# Altium PCB ESP32DOWDQ6.PcbDoc (part 1 of 2)
Units mm, origin at the board's own origin, x right, y up, seen from the top; angles counter-clockwise.
Board outline 70 x 35 mm, 2 copper layers (Top Layer, Bottom Layer); 86 components, 85 nets, 513 pads, 4 vias.
Unrouted connection lines stored in the file: 70.
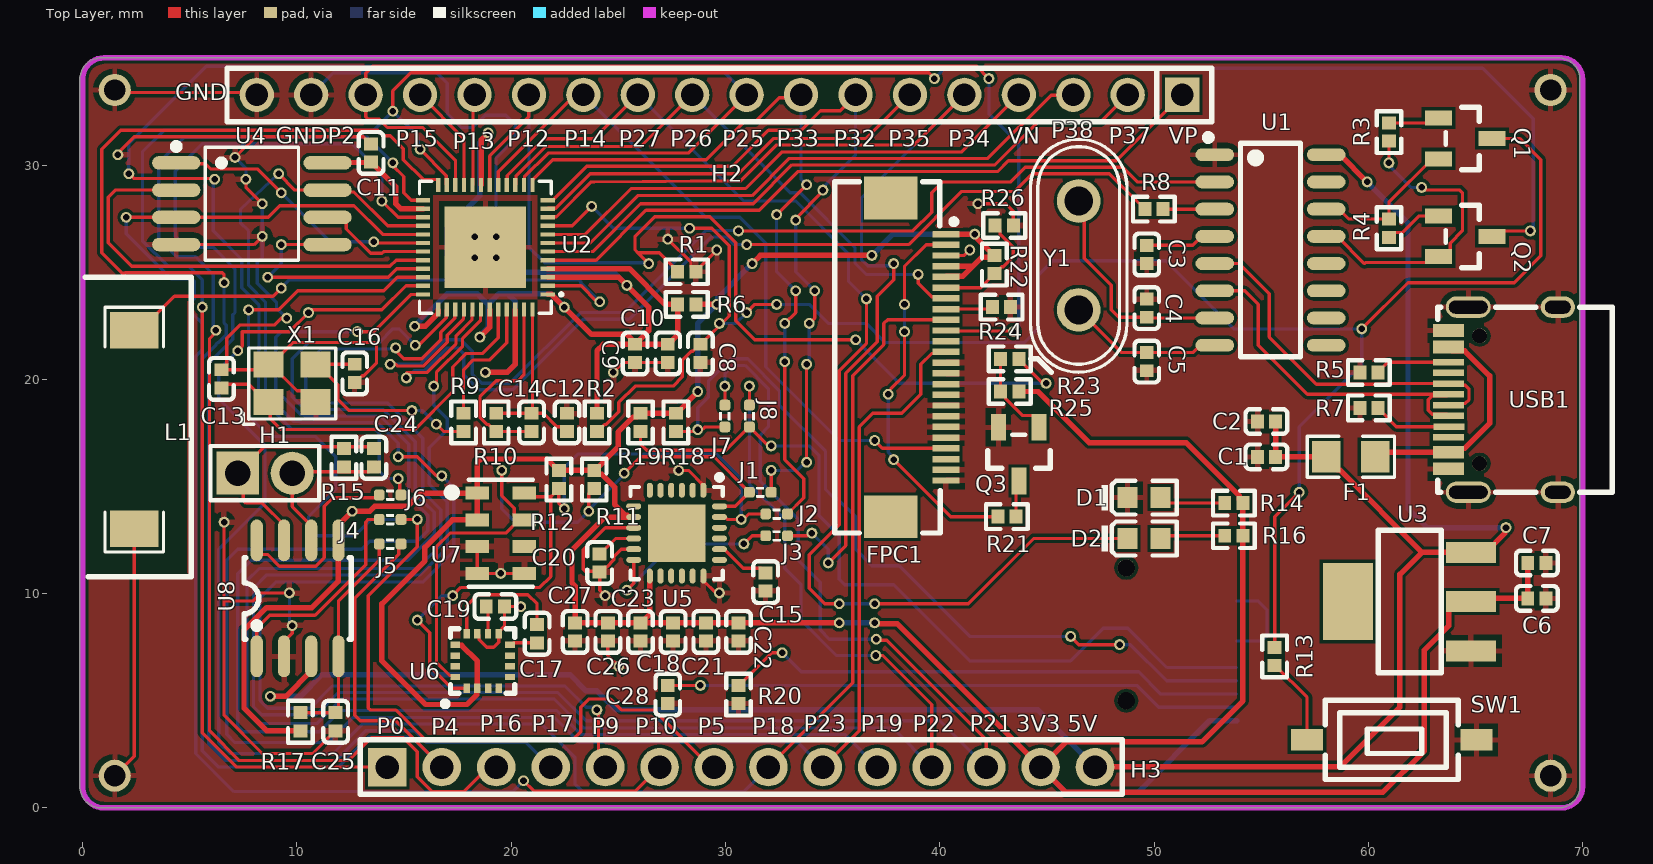
[diagram p0: Top Layer view]
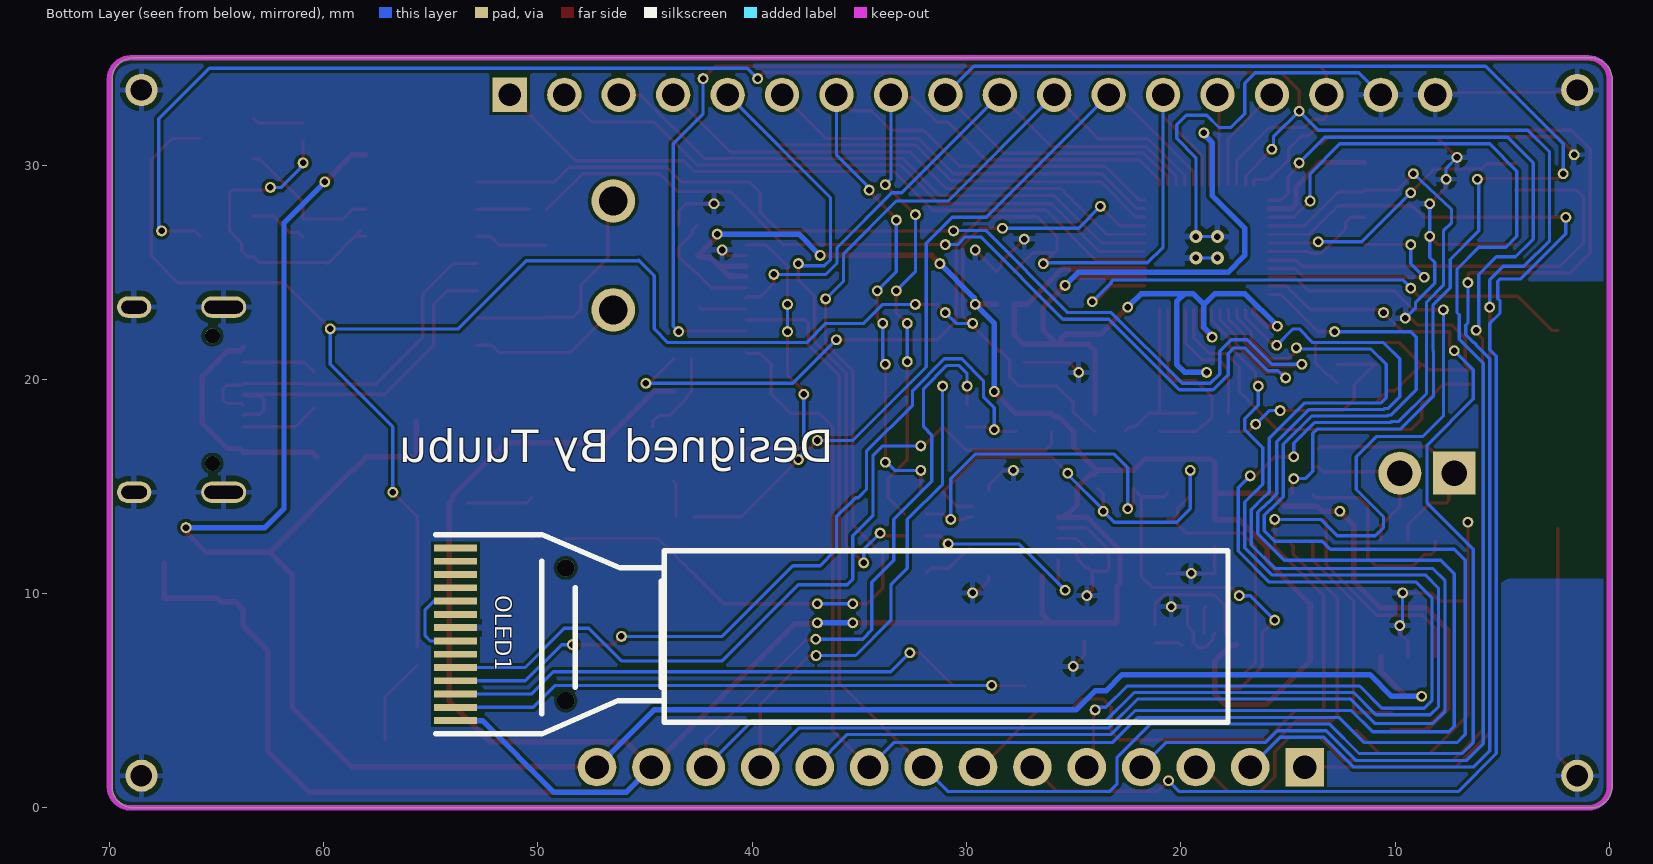
[diagram p1: Bottom Layer view, seen from below]
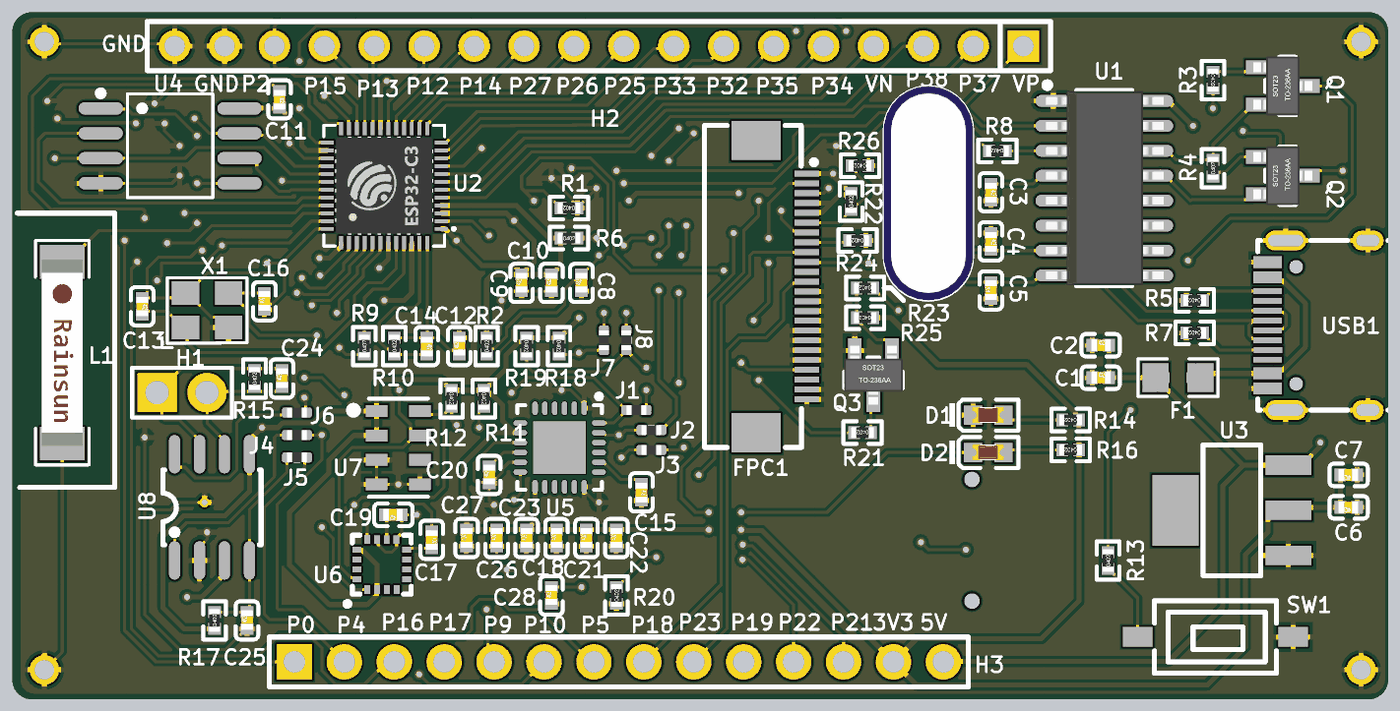
[diagram p3: 3D render of the assembled board from above, using the file's embedded part models]

## Layer stack, top to bottom
Top Solder: solder mask 0.0102, Solder Resist, Dk 3.5
Top Layer: signal copper 0.0356
Dielectric 1: dielectric 0.32, FR-4, Dk 4.8
Bottom Layer: signal copper 0.0356
Bottom Solder: solder mask 0.0102, Solder Resist, Dk 3.5

## Board outline
-0.127,1 -0.127,34 cw(c0.873,34) 0.873,35 68.873,35 cw(c68.873,34) 69.873,34 69.873,1 cw(c68.873,1) 68.873,0 0.873,0 cw(c0.873,1)

## Design rules (kind name [scope] priority, off if disabled: settings)
Clearance [All] p1: gap=0.152 ignorepadtopadclearanceinfootprint=TRUE
HoleSize [All] p1: absolutevalues=TRUE maxlimit=2.54 minlimit=0.254 maxpercent=80.000 minpercent=20.000
HoleToHoleClearance [All] p1: gap=0.102 allowstackedmicrovias=TRUE
MinimumSolderMaskSliver [All] p1: minsoldermaskwidth=0.102
PolygonConnect [All] p1: connectstyle=Relief reliefconductorwidth=0.254 reliefentries=4 polygonreliefangle="90 Angle" airgapwidth=0.254
RoutingVias [All] p1: holewidth=0.305 width=0.61 viastyle="Through Hole" minholewidth=0.305 minwidth=0.61 maxholewidth=0.305 maxwidth=0.61
SilkToSilkClearance [All] p1: silktosilkclearance=0.025
SilkToSolderMaskClearance [IsPad] p1: minsilkscreentomaskgap=0.025 clearancetoexposedcopper=TRUE
SolderMaskExpansion [All] p1: expansion=0.102 istentingtop=FALSE
Width power [InNetClass('VCC')] p1: maxlimit=0.508 minlimit=0.254 preferedwidth=0.254
Width [All] p2: maxlimit=0.152 minlimit=0.152 preferedwidth=0.152
25 further rules are at their usual default settings.

## Classes and differential pairs
net class VCC: 3V3 3V3A 5VD VBUS VDD_SDIO

## Components (designator, comment, footprint, x,y, rotation, side; value= is the part's Value field where it differs from the comment)
C1 "10uF (106) 20% 6.3V" 0402_C 55.245,16.383 r0 top
C2 "100nF (104) 10% 16V" 0402_C 55.245,18.034 r0 top
C3 "100nF (104) 10% 16V" 0402_C 49.657,25.825 r270 top
C4 "22pF (220) 5% 50V" 0402_C 49.657,23.324 r270 top
C5 "22pF (220) 5% 50V" 0402_C 49.657,20.828 r90 top
C6 "10uF (106) 20% 6.3V" 0402_C 67.862,9.779 r180 top
C7 "100nF (104) 10% 16V" 0402_C 67.862,11.43 r180 top
C8 "100nF (104) 10% 16V" 0402_C 28.829,21.209 r90 top
C9 "10uF (106) 20% 6.3V" 0402_C 25.781,21.209 r90 top
C10 "100nF (104) 10% 16V" 0402_C 27.305,21.209 r90 top
C11 "1.0uF (105) 10% 25V" 0402_C 13.462,30.563 r270 top
C12 "10nF (103) 10% 50V" 0402_C 22.606,17.99 r90 top
C13 "10pF (100) 5% 50V" 0402_C 6.477,20.022 r270 top
C14 "330pF (331) 5% 50V" 0402_C 20.955,17.99 r270 top
C15 "2.2nF (222) 10% 50V" 0402_C 31.877,10.541 r270 top
C16 "10pF (100) 5% 50V" 0402_C 12.7,20.276 r90 top
C17 "2.2nF (222) 10% 50V" 0402_C 21.209,8.128 r270 top
C18 "2.2nF (222) 10% 50V" 0402_C 27.559,8.211 r90 top
C19 "4.7uF (475) 20% 10V" 0402_C 19.26,9.398 r180 top
C20 "100nF (104) 10% 16V" 0402_C 24.13,11.43 r90 top
C21 "10nF (103) 10% 50V" 0402_C 29.083,8.211 r90 top
C22 "2.2nF (222) 10% 50V" 0402_C 30.607,8.211 r90 top
C23 "100nF (104) 10% 16V" 0402_C 26.035,8.211 r90 top
C24 "100pF (101) 5% 50V" 0402_C 13.589,16.339 r90 top
C25 "15pF (150) 5% 50V" 0402_C 11.811,4.02 r90 top
C26 "1.0uF (105) 10% 25V" 0402_C 24.511,8.211 r90 top
C27 "4.7uF (475) 20% 10V" 0402_C 22.987,8.211 r90 top
C28 "4.7uF (475) 20% 10V" 0402_C 27.305,5.29 r90 top
D1 "白灯 0603" 0603_LED_S1 49.522,14.478 r0 top
D2 "白灯 0603" 0603_LED_S1 49.522,12.573 r0 top
F1 "ASMD0805-050" F0805 59.182,16.383 r180 top
FPC1 "FPC-05F-24PH20" FPC-SMD_24P-P0.50_FPC-05F-24PH20 39.007,21.029 r270 top
H1 "X6511WV-02H-C30D60" HDR-TH_2P-P2.54-V-M 8.509,15.621 r0 top
H2 "KH-2.54PH180-1X18P-L11.5" HDR-TH_18P-P2.54-V-M 29.718,33.274 r180 top
H3 "KH-2.54PH180-1X14P-L11.5" HDR-TH_14P-P2.54-V-M 30.734,1.905 r0 top
J1 "跳线" RES_0402 31.623,14.732 r0 top
J2 "跳线" RES_0402 32.385,13.716 r0 top
J3 "跳线" RES_0402 32.385,12.7 r0 top
J4 "跳线" RES_0402 14.351,13.462 r0 top
J5 "跳线" RES_0402 14.351,12.319 r0 top
J6 "跳线" RES_0402 14.351,14.605 r0 top
J7 "跳线" RES_0402 29.972,18.288 r90 top
J8 "跳线" RES_0402 31.115,18.288 r90 top
L1 "AN9520-245" ANT-SMD_L9.5-W2.1 2.413,17.653 r270 top
OLED1 "QG-2832TLBFG02" OLED-SMD_QG-9616TSWCG02 53.848,8.102 r0 bottom
Q1 "SS8050 Y1" SOT-23(SOT-23-3) 64.516,31.242 r180 top
Q2 "SS8050 Y1" SOT-23(SOT-23-3) 64.516,26.67 r180 top
Q3 "SS8050 Y1" SOT-23(SOT-23-3) 43.688,16.51 r90 top
R1 "10KΩ (1002) ±1%" 0402_R 28.194,25.019 r180 top
R2 "10KΩ (1002) ±1%" 0402_R 24.003,17.99 r90 top
R3 "12KΩ (1202) ±1%" 0402_R 60.96,31.54 r270 top
R4 "12KΩ (1202) ±1%" 0402_R 60.96,27.051 r90 top
R5 "5.1KΩ (5101) ±1%" 0402_R 60.027,20.32 r180 top
R6 "0Ω (0R0) ±1%" 0402_R 28.194,23.495 r0 top
R7 "5.1KΩ (5101) ±1%" 0402_R 60.027,18.669 r180 top
R8 "49.9Ω (49R9) ±1%" 0402_R 49.994,27.94 r180 top
R9 "0Ω (0R0) ±1%" 0402_R 17.78,17.99 r90 top
R10 "20KΩ (2002) ±1%" 0402_R 19.304,17.99 r90 top
R11 "4.7KΩ (4701) ±1%" 0402_R 23.876,15.323 r270 top
R12 "4.7KΩ (4701) ±1%" 0402_R 22.225,15.323 r270 top
R13 "1KΩ (1001) ±1%" 0402_R 55.626,7.068 r90 top
R14 "1KΩ (1001) ±1%" 0402_R 53.721,14.224 r180 top
R15 "10Ω (10R0) ±1%" 0402_R 12.192,16.339 r90 top
R16 "1KΩ (1001) ±1%" 0402_R 53.721,12.7 r180 top
R17 "4.7KΩ (4701) ±1%" 0402_R 10.16,4.02 r90 top
R18 "4.7KΩ (4701) ±1%" 0402_R 27.686,17.99 r270 top
R19 "4.7KΩ (4701) ±1%" 0402_R 26.035,17.99 r270 top
R20 "470Ω (4700) ±1%" 0402_R 30.607,5.29 r90 top
R21 "10Ω (10R0) ±1%" 0402_R 43.136,13.589 r180 top
R22 "4.7KΩ (4701) ±1%" 0402_R 42.545,25.356 r90 top
R23 "1KΩ (1001) ±1%" 0402_R 43.263,20.955 r180 top
R24 "4.7KΩ (4701) ±1%" 0402_R 42.882,23.368 r180 top
R25 "10KΩ (1002) ±1%" 0402_R 43.263,19.431 r180 top
R26 "4.7KΩ (4701) ±1%" 0402_R 43.009,27.178 r180 top
SW1 "TS-1092S-B1D2-W" SW-SMD_L6.1-W3.6-LS7.9 61.087,3.175 r180 top
U1 "CH340G" SOIC-16_150mil 55.432,26.035 r270 top
U2 "ESP32" QFN-48-EP3.8 18.796,26.162 r90 top
U3 "AMS1117-3.3_C369933" SOT-223-3_L6.5-W3.4-P2.30-LS7.0-BR 61.927,9.628 r0 top
U4 "GD25Q32CSIG_C318845" SOIC-8_L5.3-W5.3-P1.27-LS8.0-BL 7.9,28.194 r270 top
U5 "MPU-6050" QFN-24_4x4x05P 27.718,12.823 r180 top
U6 "HWC5883L" LPCC-16_L3.0-W3.0-P0.50-BL 18.669,6.858 r0 top
U7 "MS5611" MS5611 19.515,12.817 r0 top
U8 "TJA1042T/1J" SOIC-8_L5.0-W4.0-P1.27-LS6.0-BL 10.033,9.779 r0 top
USB1 "TYPEC-304-BCP16" USB-C-SMD_TYPEC-304-BCP16 66.294,19.05 r90 top
X1 "40MHz" OSC-SMD_4P-L3.2-W2.5-BL 9.779,19.812 r0 top
Y1 "XTAL" XTAL_socket 46.482,25.781 r90 top

## Footprints (in the part's own frame and the unit in brackets; to place one, negate y for a bottom-side part, rotate by r counter-clockwise, add the part's x,y. Pads: shape width x height; smd on the part's side, far side on the other; paste and mask are expansions set on the pad)
0402_C [mm]
  rect 0.6x0.65 smd mask+0.051: 1(-0.425,0) 2(0.425,0)
  silkscreen extent -0.97,-0.58 0.97,0.58, body extent -0.48,-0.3 0.52,0.3, height 0.2
0402_R [mm]
  rect 0.6x0.65 smd mask+0.051: 1(-0.425,0) 2(0.425,0)
  silkscreen extent -0.97,-0.58 0.98,0.58, body extent -0.57,-0.27 0.58,0.28, height 0.41
0603_LED_S1 [mm]
  rect 0.93x0.98 smd: A(0.77,0) K(-0.77,0)
  silkscreen extent -1.98,-0.79 1.54,0.79, body extent -0.8,-0.4 0.8,0.4, height 0.6
ANT-SMD_L9.5-W2.1 [mm] "陶瓷天线pcb"
  rect 1.71x2.268 smd: 1(-4.63,0) 2(4.63,0)
  silkscreen extent -5.71,-1.36 5.71,1.36, body extent -4.75,-1.05 4.75,1.05
F0805 [mm]
  rect 1.335x1.458 smd: 1(-1.142,0) 2(1.142,0)
  silkscreen extent -2.04,-0.96 2.04,0.96
FPC-SMD_24P-P0.50_FPC-05F-24PH20 [mm]
  rect 0.3x1.25 smd: 1(-5.75,1.288) 2(-5.25,1.288) 3(-4.75,1.288) 4(-4.25,1.288) 5(-3.75,1.288) 6(-3.25,1.288) 7(-2.75,1.288) 8(-2.25,1.288) 9(-1.75,1.288) 10(-1.25,1.288) 11(-0.75,1.288) 12(-0.25,1.288) 13(0.25,1.288) 14(0.75,1.288) 15(1.25,1.288) 16(1.75,1.288) 17(2.25,1.288) 18(2.75,1.288) 19(3.25,1.288) 20(3.75,1.288) 21(4.25,1.288) 22(4.75,1.288) 23(5.25,1.288) 24(5.75,1.288)
  rect 2x2.5 smd: 25(7.44,-1.288) 26(-7.44,-1.288)
  silkscreen extent -8.2,-3.91 8.2,1.78, body extent -8.85,-3.49 8.85,0.66, height 1.9
HDR-TH_2P-P2.54-V-M [mm]
  rect 2x2 hole 1.2: 1(-1.27,0)
  round 2 hole 1.2: 2(1.27,0)
  silkscreen extent -2.54,-1.27 2.54,1.27
HDR-TH_14P-P2.54-V-M [mm]
  rect 1.8x1.8 hole 1.1: 1(-16.51,0)
  round 1.8 hole 1.1: 2(-13.97,0) 3(-11.43,0) 4(-8.89,0) 5(-6.35,0) 6(-3.81,0) 7(-1.27,0) 8(1.27,0) 9(3.81,0) 10(6.35,0) 11(8.89,0) 12(11.43,0) 13(13.97,0) 14(16.51,0)
  silkscreen extent -17.78,-1.27 17.78,1.27
HDR-TH_18P-P2.54-V-M [mm]
  rect 1.6x1.6 hole 1.05: 1(-21.59,0)
  round 1.6 hole 1.05: 2(-19.05,0) 3(-16.51,0) 4(-13.97,0) 5(-11.43,0) 6(-8.89,0) 7(-6.35,0) 8(-3.81,0) 9(-1.27,0) 10(1.27,0) 11(3.81,0) 12(6.35,0) 13(8.89,0) 14(11.43,0) 15(13.97,0) 16(16.51,0) 17(19.05,0) 18(21.59,0)
  silkscreen extent -22.98,-1.25 22.98,1.25
LPCC-16_L3.0-W3.0-P0.50-BL [mm]
  rect 0.3x0.45 smd: 1(-0.749,-1.275) 2(-0.249,-1.275) 3(0.251,-1.275) 4(0.751,-1.275) 9(0.75,1.275) 10(0.25,1.275) 11(-0.25,1.275) 12(-0.749,1.275)
  rect 0.45x0.3 smd: 5(1.275,-0.748) 6(1.275,-0.248) 7(1.275,0.252) 8(1.275,0.752) 13(-1.275,0.752) 14(-1.275,0.252) 15(-1.275,-0.248) 16(-1.275,-0.748)
  silkscreen extent -1.87,-2.12 1.5,1.5
MS5611 [mm]
  rect 1.1x0.6 smd: 1(-1.1,1.875) 2(-1.1,0.625) 3(-1.1,-0.625) 4(-1.1,-1.875) 5(1.1,-1.875) 6(1.1,-0.625) 7(1.1,0.625) 8(1.1,1.875)
  silkscreen extent -2.41,-2.5 1.5,2.5
OLED-SMD_QG-9616TSWCG02 [mm]
  rect 2x0.32 smd: 1(0,-4.03) 2(0,-3.41) 3(0,-2.79) 4(0,-2.17) 5(0,-1.55) 6(0,-0.93) 7(0,-0.31) 8(0,0.31) 9(0,0.93) 10(0,1.55) 11(0,2.17) 12(0,2.79) 13(0,3.409) 14(0,4.03)
  round 0.8 hole 0.8 unplated: ""(-5.15,-3.1) ""(-5.15,3.1)
  silkscreen extent -36.05,-4.65 0.93,4.65
OSC-SMD_4P-L3.2-W2.5-BL [mm]
  rect 1.4x1.2 smd: 1(-1.1,-0.875) 2(1.1,-0.875) 3(1.1,0.875) 4(-1.1,0.875)
  silkscreen extent -2.29,-1.9 2.03,1.65
QFN-24_4x4x05P [mm]
  rect 2.68x2.68 smd mask+0.051: 0(0,0)
  oval 0.28x0.7 smd mask+0.051: 1(-1.25,-2) 2(-0.75,-2) 3(-0.25,-2) 4(0.25,-2) 5(0.75,-2) 6(1.25,-2) 13(1.25,2) 14(0.75,2) 15(0.25,2) 16(-0.25,2) 17(-0.75,2) 18(-1.25,2)
  oval 0.7x0.28 smd mask+0.051: 7(2,-1.25) 8(2,-0.75) 9(2,-0.25) 10(2,0.25) 11(2,0.75) 12(2,1.25) 19(-2,1.25) 20(-2,0.75) 21(-2,0.25) 22(-2,-0.25) 23(-2,-0.75) 24(-2,-1.25)
  silkscreen extent -2.15,-2.72 2.15,2.15
QFN-48-EP3.8 [mm]
  rect 0.2x0.665 smd: 1(-2.2,-2.908) 2(-1.8,-2.908) 3(-1.4,-2.908) 4(-1,-2.908) 5(-0.6,-2.908) 6(-0.2,-2.908) 7(0.2,-2.908) 8(0.6,-2.908) 9(1,-2.908) 10(1.4,-2.908) 11(1.8,-2.908) 12(2.2,-2.908) 25(2.2,2.908) 26(1.8,2.908) 27(1.4,2.908) 28(1,2.908) 29(0.6,2.908) 30(0.2,2.908) 31(-0.2,2.908) 32(-0.6,2.908) 33(-1,2.908) 34(-1.4,2.908) 35(-1.8,2.908) 36(-2.2,2.908)
  rect 0.665x0.2 smd: 13(2.908,-2.2) 14(2.908,-1.8) 15(2.908,-1.4) 16(2.908,-1) 17(2.908,-0.6) 18(2.908,-0.2) 19(2.908,0.2) 20(2.908,0.6) 21(2.908,1) 22(2.908,1.4) 23(2.908,1.8) 24(2.908,2.2) 37(-2.908,2.2) 38(-2.908,1.8) 39(-2.908,1.4) 40(-2.908,1) 41(-2.908,0.6) 42(-2.908,0.2) 43(-2.908,-0.2) 44(-2.908,-0.6) 45(-2.908,-1) 46(-2.908,-1.4) 47(-2.908,-1.8) 48(-2.908,-2.2)
  rect 3.8x3.8 smd: 49(0,0)
  silkscreen extent -3.08,-3.61 3.08,3.08, body extent -2.5,-2.5 2.5,2.5, height 1.12
RES_0402 [mil]
  rrect50% 20x20 smd: 1(-20,0) 2(20,0)
  silkscreen extent -6,-10 6,10, body extent -20,-10 20,10, height 14
SOIC-8_L5.0-W4.0-P1.27-LS6.0-BL [mil]
  oval 22.38x76.78 smd: 1(-75,-106.5) 2(-25,-106.5) 3(25,-106.5) 4(75,-106.5) 5(75,106.5) 6(25,106.5) 7(-25,106.5) 8(-75,106.5)
  silkscreen extent -98,-75 98,75
SOIC-8_L5.3-W5.3-P1.27-LS8.0-BL [mm]
  oval 0.63x2.25 smd: 1(-1.905,-3.53) 2(-0.635,-3.53) 3(0.635,-3.53) 4(1.905,-3.53) 5(1.905,3.53) 6(0.635,3.53) 7(-0.635,3.53) 8(-1.905,3.53)
  silkscreen extent -2.82,-3.68 2.64,2.18
SOIC-16_150mil [mm]
  oval 0.6x1.8 smd: 1(-4.445,-2.6) 2(-3.175,-2.6) 3(-1.905,-2.6) 4(-0.635,-2.6) 5(0.635,-2.6) 6(1.905,-2.6) 7(3.175,-2.6) 8(4.445,-2.6) 9(4.445,2.6) 10(3.175,2.6) 11(1.905,2.6) 12(0.635,2.6) 13(-0.635,2.6) 14(-1.905,2.6) 15(-3.175,2.6) 16(-4.445,2.6)
  silkscreen extent -5.4,-3.05 4.97,1.4, body extent -4.95,-2.97 4.95,3.03, height 1.75
SOT-23(SOT-23-3) [mm]
  rect 1.25x0.7 smd: 1(1.25,-0.95) 2(1.25,0.95) 3(-1.25,0)
  silkscreen extent -0.65,-1.46 0.9,1.46, body extent -1.5,-1.5 1.5,1.5, height 1.3
SOT-223-3_L6.5-W3.4-P2.30-LS7.0-BR [mm]
  rect 2.34x0.98 smd: 1(2.87,-2.3) 2(2.87,0) 3(2.87,2.3)
  rect 2.34x3.6 smd: 4(-2.87,0)
  silkscreen extent -1.47,-3.33 1.47,3.33
SW-SMD_L6.1-W3.6-LS7.9 [mm]
  rect 1.5x1 smd: 1(-3.95,0) 2(3.95,0)
  silkscreen extent -3.1,-1.85 3.1,1.85
USB-C-SMD_TYPEC-304-BCP16 [mm]
  oval 1x2.1 hole 0.6 slot 1.8 at 90 deg: 13(-4.32,1.633) 14(4.32,1.633)
  oval 1x1.6 hole 0.6 slot 1.2 at 90 deg: 15(-4.32,-2.547) 16(4.32,-2.547)
  rect 0.6x1.45 smd: A1B12(-3.225,2.547) A4B9(-2.45,2.547) B1A12(3.22,2.547) B4A9(2.45,2.547)
  rect 0.3x1.45 smd: A5(-1.26,2.532) A6(-0.25,2.547) A7(0.25,2.547) A8(1.25,2.547) B5(1.75,2.547) B6(0.75,2.547) B7(-0.75,2.547) B8(-1.75,2.547)
  round 0.7 hole 0.7 unplated: ""(-2.98,1.102) ""(2.98,1.102)
  silkscreen extent -4.32,-5.08 4.32,3.05
XTAL_socket [mil]
  round 80 hole 53: 1(100,0) 2(-100,0)
  silkscreen extent -215,-89 214,89, body extent -214,-89 214,89, height 102

## Part data
C1 C6 C9: library part "0402 10uF (106) 20% 6.3V", "贴片电容", Package=0402, SuppliersPartNumber=C15525, ComponentLink1Description=供应商链接, ComponentLink1URL=http://www.szlcsc.com/product/details_16204.html, Supplier=LC
C2 C3 C7 C8 C10 C20 C23: library part "0402 100nF (104) 10% 16V", "贴片电容", Package=0402, SuppliersPartNumber=C1525, ComponentLink1Description=供应商链接, ComponentLink1URL=http://www.szlcsc.com/product/details_1877.html, Supplier=LC
C4 C5: library part "0402 22pF (220) 5% 50V", "贴片电容", Package=0402, SuppliersPartNumber=C1555, ComponentLink1Description=供应商链接, ComponentLink1URL=http://www.szlcsc.com/product/details_1907.html, Supplier=LC
C11 C26: library part "0402 1.0uF (105) 10% 25V", "贴片电容", Package=0402, SuppliersPartNumber=C52923, ComponentLink1Description=供应商链接, ComponentLink1URL=http://www.szlcsc.com/product/details_53938.html, Supplier=LC
C12 C21: library part "0402 10nF (103) 10% 50V", "贴片电容", Package=0402, SuppliersPartNumber=C15195, ComponentLink1Description=供应商链接, ComponentLink1URL=http://www.szlcsc.com/product/details_15869.html, Supplier=LC
C13 C16: library part "0402 10pF (100) 5% 50V", "贴片电容", Package=0402, SuppliersPartNumber=C32949, ComponentLink1Description=供应商链接, ComponentLink1URL=http://www.szlcsc.com/product/details_33914.html, Supplier=LC
C14: library part "0402 330pF (331) 5% 50V", "贴片电容", Package=0402, SuppliersPartNumber=C13533, ComponentLink1Description=供应商链接, ComponentLink1URL=http://www.szlcsc.com/product/details_14182.html, Supplier=LC
C15 C17 C18 C22: library part "0402 2.2nF (222) 10% 50V", "贴片电容", Package=0402, SuppliersPartNumber=C1531, ComponentLink1Description=供应商链接, ComponentLink1URL=http://www.szlcsc.com/product/details_1883.html, Supplier=LC
C19 C27 C28: library part "0402 4.7uF (475) 20% 10V", "贴片电容", Package=0402, SuppliersPartNumber=C23733, ComponentLink1Description=供应商链接, ComponentLink1URL=http://www.szlcsc.com/product/details_24469.html, Supplier=LC
C24: library part "0402 100pF (101) 5% 50V", "贴片电容", Package=0402, SuppliersPartNumber=C1546, ComponentLink1Description=供应商链接, ComponentLink1URL=http://www.szlcsc.com/product/details_1898.html, Supplier=LC
C25: library part "0402 15pF (150) 5% 50V", "贴片电容", Package=0402, SuppliersPartNumber=C1548, ComponentLink1Description=供应商链接, ComponentLink1URL=http://www.szlcsc.com/product/details_1900.html, Supplier=LC
D1 D2: library part "0603 白灯", "发光二极管", Package=0603, SuppliersPartNumber=C2290, ComponentLink1Description=供应商链接, ComponentLink1URL=http://www.szlcsc.com/product/details_2663.html, Supplier=LC
F1: BOM_JLCPCB Part Class="Extended Part", BOM_Manufacturer=JDTFUSE, BOM_Manufacturer Part=ASMD0805-050, BOM_Supplier=LCSC, BOM_Supplier Part=C135329, Contributor=LCSC, spicePre=F, spiceSymbolName=ASMD0805-050
FPC1: "FPC24脚", BOM_Manufacturer=XUNPU(讯普), BOM_Manufacturer Part=FPC-05F-24PH20, BOM_Supplier=LCSC, BOM_Supplier Part=C2856805, Contributor=LCSC, spicePre=F, spiceSymbolName=FPC-05F-24PH20
H1: library part HDR-2P, BOM_JLCPCB Part Class="Extended Part", BOM_Manufacturer="XKB Connectivity", BOM_Manufacturer Part=X6511WV-02H-C30D60, BOM_Supplier=LCSC, BOM_Supplier Part=C706874, Contributor=LCSC, spicePre=H, spiceSymbolName=X6511WV-02H-C30D60
H2: library part HDR-18P, BOM_Manufacturer=kinghelm(金航标), BOM_Manufacturer Part=KH-2.54PH180-1X18P-L11.5, BOM_Supplier=LCSC, BOM_Supplier Part=C2905492, Contributor=LCSC, spicePre=H, spiceSymbolName=KH-2.54PH180-1X18P-L11.5
H3: library part HDR-14P, "排针", BOM_Manufacturer=kinghelm(金航标), BOM_Manufacturer Part=KH-2.54PH180-1X14P-L11.5, BOM_Supplier=LCSC, BOM_Supplier Part=C2905490, Contributor=LCSC, spicePre=H, spiceSymbolName=KH-2.54PH180-1X14P-L11.5
J1 J2 J3 J4 J5 J6 J7 J8: "Resistor", LatestRevisionDate=17-Jul-2002, LatestRevisionNote="Re-released for DXP Platform.", PackageDescription="Axial Device, Thru-Hole; 2 Leads; 0.4 in Pin Spacing", PackageReference=AXIAL-0.4, Published=8-Jun-2000, Publisher="Altium Limited"
L1: "陶瓷wifi/bt天线", BOM_JLCPCB Part Class="Extended Part", BOM_Manufacturer=Rainsun, BOM_Manufacturer Part=AN9520-245, BOM_Supplier=LCSC, BOM_Supplier Part=C99665, spicePre=L, spiceSymbolName=AN9520-245
OLED1: library part OLED, BOM_JLCPCB Part Class="Extended Part", BOM_Manufacturer=Allvision, BOM_Manufacturer Part=QG-2832TLBFG02, BOM_Supplier=LCSC, BOM_Supplier Part=C91220, Contributor=LCSC, spicePre=O, spiceSymbolName=QG-2832TLBFG02
Q1 Q2 Q3: library part "SOT-23 SS8050 Y1", "三极管", Package=SOT-23, SuppliersPartNumber=C2150, ComponentLink1Description=供应商链接, ComponentLink1URL=http://www.szlcsc.com/product/details_2507.html, Supplier=LC
R1 R2 R25: library part "0402 10KΩ (1002) 1%", "贴片电阻", Package=0402, SuppliersPartNumber=C25744, ComponentLink1Description=供应商链接, ComponentLink1URL=http://www.szlcsc.com/product/details_26487.html, Supplier=LC
R3 R4: library part "0402 12KΩ (1202) 1%", "贴片电阻", Package=0402, SuppliersPartNumber=C25752, ComponentLink1Description=供应商链接, ComponentLink1URL=http://www.szlcsc.com/product/details_26495.html, Supplier=LC
R5 R7: library part "0402 5.1KΩ (5101) 1%", "贴片电阻", Package=0402, SuppliersPartNumber=C25905, ComponentLink1Description=供应商链接, ComponentLink1URL=http://www.szlcsc.com/product/details_26648.html, Supplier=LC
R6 R9: library part "0402 0Ω (0R0) 1%", "贴片电阻", Package=0402, SuppliersPartNumber=C17168, ComponentLink1Description=供应商链接, ComponentLink1URL=http://www.szlcsc.com/product/details_17853.html, Supplier=LC
R8: library part "0402 49.9Ω (49R9) 1%", "贴片电阻", Package=0402, SuppliersPartNumber=C25120, ComponentLink1Description=供应商链接, ComponentLink1URL=http://www.szlcsc.com/product/details_25863.html, Supplier=LC
R10: library part "0402 20KΩ (2002) 1%", "贴片电阻", Package=0402, SuppliersPartNumber=C25765, ComponentLink1Description=供应商链接, ComponentLink1URL=http://www.szlcsc.com/product/details_26508.html, Supplier=LC
R11 R12 R17 R18 R19 R22 R24 R26: library part "0402 4.7KΩ (4701) 1%", "贴片电阻", Package=0402, SuppliersPartNumber=C25900, ComponentLink1Description=供应商链接, ComponentLink1URL=http://www.szlcsc.com/product/details_26643.html, Supplier=LC
R13 R14 R16 R23: library part "0402 1KΩ (1001) 1%", "贴片电阻", Package=0402, SuppliersPartNumber=C11702, ComponentLink1Description=供应商链接, ComponentLink1URL=http://www.szlcsc.com/product/details_12256.html, Supplier=LC
R15 R21: library part "0402 10Ω (10R0) 1%", "贴片电阻", Package=0402, SuppliersPartNumber=C25077, ComponentLink1Description=供应商链接, ComponentLink1URL=http://www.szlcsc.com/product/details_25820.html, Supplier=LC
R20: library part "0402 470Ω (4700) 1%", "贴片电阻", Package=0402, SuppliersPartNumber=C25117, ComponentLink1Description=供应商链接, ComponentLink1URL=http://www.szlcsc.com/product/details_25860.html, Supplier=LC
SW1: "触控开关", BOM_JLCPCB Part Class="Extended Part", BOM_Manufacturer=Yuandi(台湾元迪), BOM_Manufacturer Part=TS-1092S-B1D2-W, BOM_Supplier=LCSC, BOM_Supplier Part=C782859, Contributor=LCSC, spicePre=S, spiceSymbolName=TS-1092S-B1D2-W
U1: library part CH340G_[C14267], "USB", Package=SOIC-16_150mil, SuppliersPartNumber=C14267, ComponentLink1Description=供应商链接, ComponentLink1URL=http://www.szlcsc.com/product/details_14927.html, Supplier=LC
U2: BOM_JLCPCB Part Class="Extended Part", BOM_Manufacturer=ESPRESSIF, BOM_Manufacturer Part=ESP32, BOM_Supplier=LCSC, BOM_Supplier Part=C80134, spicePre=U, spiceSymbolName=ESP32
U3: library part AMS1117-3.3, BOM_Manufacturer=KEXIN, BOM_Manufacturer Part=AMS1117-3.3, BOM_Paste Type=expand, BOM_Supplier=LCSC, BOM_Supplier Part=C369933, Contributor=LCSC, spicePre=U, spiceSymbolName=AMS1117-3.3_C369933
U4: BOM_JLCPCB Part Class="Extended Part", BOM_Manufacturer="GigaDevice Semicon Beijing", BOM_Manufacturer Part=GD25Q32CSIG, BOM_Supplier=LCSC, BOM_Supplier Part=C318845, Contributor=LCSC, spicePre=U, spiceSymbolName=GD25Q32CSIG_C318845
U5: library part MPU-6050_[C24112], "传感器", Package=QFN-24_4x4x05P, SuppliersPartNumber=C24112, ComponentLink1Description=供应商链接, ComponentLink1URL=http://www.szlcsc.com/product/details_24852.html, Supplier=LC
U6: library part HMC5883L
U8: "CAN芯片", BOM_JLCPCB Part Class="Extended Part", BOM_Manufacturer=NXP, BOM_Manufacturer Part=TJA1042T/1J, BOM_Supplier=LCSC, BOM_Supplier Part=C53670, spicePre=U, spiceSymbolName=TJA1042T/1J
USB1: BOM_Manufacturer=XUNPU, BOM_Manufacturer Part=TYPEC-304-BCP16, BOM_Supplier=LCSC, BOM_Supplier Part=C720629, Contributor=LCSC, spicePre=U, spiceSymbolName=TYPEC-304-BCP16
X1: "有源晶振", BOM_Manufacturer=TKD, BOM_Manufacturer Part=3225-20MHZ-15PF-10PPM, BOM_Supplier=LCSC, BOM_Supplier Part=C337680, Contributor=LCSC, nameAlias=Frequency, spicePre=X, spiceSymbolName=3225-20MHZ-15PF-10PPM
Y1: "Crystal Oscillator", LatestRevisionDate=17-Jul-2002, LatestRevisionNote="Re-released for DXP Platform.", PackageDescription="Crystal, Thru-Hole; 2 Leads; Body 3.1 x 8.2 mm (Dia.xH)", PackageReference=R38, Published=8-Jun-2000, Publisher="Altium Limited"

## Free pads (board coordinates)
  round 1.5 hole 1: 158(1.5,1.5) 158(1.5,33.5) 158(68.5,1.5) 158(68.5,33.5)
  round 0.508 hole 0.305 mask+0.102: 159(14.478,30.099) 161(15.748,30.734) 162(13.589,26.416) 163(8.636,24.765) 164(9.271,26.289) 165(9.271,28.702) 166(13.97,28.321) 167(9.144,29.591) 168(24.13,23.622) 169(18.796,20.32) 170(18.542,21.971) 171(15.494,22.479) 172(16.51,17.907) 173(15.367,18.542) 174(16.383,19.685) 175(15.113,20.066) 176(14.351,20.701) 177(15.527,21.59) 178(14.605,21.463) 179(12.827,22.225) 180(10.541,23.114) 182(9.271,24.257) 183(5.588,23.368) 184(8.763,5.207) 185(9.779,8.509) 186(6.223,22.288) 187(6.604,24.511) 188(12.573,13.843) 189(23.749,28.067) 190(18.923,31.496) 191(22.479,23.368) 192(67.564,26.924) 193(42.291,34.036) 194(43.434,22.225) 195(25.4,24.384) 196(26.416,25.4) 198(41.402,26.035) 199(38.989,24.892) 200(7.747,23.241) 201(15.621,13.462) 202(14.732,15.367) 204(2.159,29.591) 205(14.478,32.512) 206(39.751,34.036) 208(7.239,21.336) 209(14.732,16.383) 210(16.764,15.494) 211(24.003,4.572) 212(2.032,27.559) 213(20.574,1.27) 214(20.447,9.398) 215(15.621,8.763) 216(17.272,9.906) 217(19.515,10.942) 218(19.558,15.748) 219(23.622,13.843) 220(22.479,13.97) 221(24.384,9.906) 222(24.765,20.32) 223(28.321,27.051) 224(28.702,19.431) 225(29.591,23.495) 226(30.607,26.924) 227(30.988,26.289) 228(62.484,28.956) 229(60.96,30.099) 230(59.944,29.21) 231(66.421,13.081) 232(33.782,29.083) 233(34.544,28.829) 234(32.385,27.686) 235(33.274,27.432) 236(25.273,15.621) 237(30.734,13.462) 238(30.861,12.319) 239(25.4,10.16) 240(59.69,22.352) 241(36.957,17.145) 242(44.958,19.812) 243(36.068,21.844) 244(36.957,9.525) 245(35.306,9.525) 246(36.576,23.749) 247(41.634,26.779) 248(36.83,25.781) 249(31.242,25.4) 250(35.306,8.636) 251(36.957,8.636) 252(32.385,23.495) 253(30.988,23.114) 254(29.718,22.606) 255(33.274,24.13) 256(32.766,22.606) 257(32.766,20.828) 258(34.163,24.13) 259(33.909,22.606) 260(33.782,20.701) 261(33.782,16.129) 262(32.131,15.748) 263(37.846,25.4) 264(34.798,11.43) 265(34.036,12.827) 266(38.354,23.495) 267(38.354,22.225) 268(37.592,19.304) 269(37.846,16.256) 270(32.639,7.239) 271(28.829,5.715) 272(32.131,16.891) 273(48.387,7.62) 274(46.101,8.001) 275(28.702,17.653) 276(37.02,7.112) 277(37.036,7.874) 278(29.972,19.685) 279(31.115,19.685) 283(56.769,14.732) 284(1.651,30.48) 285(9.525,22.86) 286(8.382,26.67) 287(25.019,6.604) 288(27.813,15.748) 289(6.604,13.335) 290(41.783,28.194) 291(6.159,29.337) 292(8.382,28.194) 293(7.62,29.337) 294(7.112,30.353) 296(29.718,10.033) 297(27.305,26.543) 298(29.591,26.035)
  round 0.508 hole 0.305: 295(9.652,10.033)

## Via types
v1: diameter 0.61, hole 0.305, Top Layer to Bottom Layer, tented both sides, 4 vias

## Nets (pads, with @x,y where several pads share a name; then routed paths per layer and width w, separated by ;. In a path a pad name is that pad's centre, name@x,y a point inside that pad or via, vN(x,y) a via of type N, cw(c..) or ccw(c..) an arc to the next point about the centre after c; other vN are vias at no path point)
3V3: C6.2 C7.2 C18.2 C21.2 C22.2 C23.2 C26.2 C27.2 FPC1.1 FPC1.4 FPC1.5 H3.13 OLED1.14 pad.188 pad.224 pad.225 pad.247 pad.248 pad.249 pad.250 pad.251 R6.2 R11.1 R12.1 R14.1 R16.1 R17.1 R18.1 R19.1 R22.2 R25.1 U3.2 U5.8 U5.13 U6.2 U6.13 U7.1 U7.2 U8.5 | length 192.4
  Top Layer w0.254: R17.1@10.16,3.595 8.597,3.595 7.531,4.661 7.531,8.293 8.585,9.347 10.699,9.347 11.938,10.586 U8.5@11.938,12.484 11.938,13.208 pad.188@12.573,13.843 13.395,13.843 13.624,14.072 15.154,14.072 15.775,14.692 U7.1@18.415,14.692 ; U6.13@17.394,7.61 17.417,7.587 17.687,7.587 18.42,6.854 U6.2@18.42,5.583 18.397,5.56 18.397,5.29 17.933,4.826 16.002,4.826 13.97,6.858 13.97,9.525 15.977,11.532 15.977,12.161 17.257,13.442 U7.2@18.415,13.442 U7.1@18.415,14.692 ; U5.8@25.718,13.573 U5.8@25.501,13.573 ; U5.13@26.468,10.823 26.468,9.044 C23.2@26.06,8.636 ; R6.2@28.619,23.495 pad.225@29.591,23.495 ; pad.224@28.702,19.431 28.702,19.406 27.711,18.415 R18.1@27.686,18.415 R19.1@26.035,18.415 25.862,18.242 25.692,18.242 24.988,17.539 24.988,16.835 23.901,15.748 R11.1@23.876,15.748 ; pad.249@31.242,25.4 31.623,25.781 pad.248@36.83,25.781 ; pad.250@35.306,8.636 C22.2@30.607,8.636 C21.2@29.083,8.636 C18.2@27.559,8.636 C23.2@26.06,8.636 ; pad.251@36.957,8.636 36.994,8.599 38.01,8.599 H3.13@44.704,1.905 ; FPC1.5@40.294,24.779 40.317,24.802 41.068,24.802 41.545,25.279 ; FPC1.4@40.294,25.279 41.545,25.279 ; FPC1.1@40.294,26.779 pad.247@41.634,26.779 41.634,26.667 42.52,25.781 R22.2@42.545,25.781 42.462,25.698 41.963,25.698 41.545,25.279 ; R25.1@43.688,19.431 44.585,19.431 46.968,17.048 51.492,17.048 53.973,14.567 53.973,14.397 R14.1@54.146,14.224 R16.1@54.146,12.7 54.146,4.997 52.233,3.084 45.883,3.084 H3.13@44.704,1.905 ; C7.2@67.437,11.43 C6.2@67.437,9.779 64.948,9.779 U3.2@64.797,9.628 64.117,9.628 63.754,9.265 63.754,8.509 62.611,7.366 62.611,2.667 60.67,0.726 45.883,0.726 H3.13@44.704,1.905 ; U7.1@18.415,14.692 18.415,16.107 18.589,16.281 21.667,16.281 22.2,15.748 R12.1@22.225,15.748 R11.1@23.876,15.748 ; R11.1@23.876,15.748 24.049,15.575 24.219,15.575 24.826,14.969 24.826,14.162 25.334,13.654 25.42,13.654 U5.8@25.501,13.573 ; U5.8@25.501,13.573 24.368,13.573 22.838,12.043 22.838,10.501 22.987,10.352 C27.2@22.987,8.636 C26.2@24.511,8.636 C23.2@26.035,8.636 C23.2@26.06,8.636
  Bottom Layer w0.254: pad.224@28.702,19.431 28.702,22.606 pad.225@29.591,23.495 29.64,23.544 29.64,23.798 pad.249@31.242,25.4 ; pad.250@35.306,8.636 pad.251@36.957,8.636 ; pad.248@36.83,25.781 37.828,26.779 pad.247@41.634,26.779 ; H3.13@44.704,1.905 45.883,0.726 49.24,0.726 52.586,4.072 OLED1.14@53.848,4.072
3V3A: C9.2 C10.2 pad.169 pad.170 pad.171 pad.190 pad.191 pad.195 R2.2 R6.1 U2.1 U2.3 U2.4 U2.19 U2.37 U2.43 U2.46 | length 67.5
  Top Layer w0.254: pad.171@15.494,22.479 15.999,22.479 16.596,23.076 U2.37@16.596,23.254 ; pad.170@18.542,21.971 18.996,22.425 U2.43@18.996,23.254 ; U2.19@18.596,29.07 18.596,31.169 pad.190@18.796,31.369 ; pad.169@18.796,20.32 19.812,20.32 20.196,20.704 U2.46@20.196,23.254 ; U2.1@21.704,23.962 21.882,23.962 23.748,22.097 25.401,22.097 25.583,21.915 25.583,21.807 C9.2@25.756,21.634 ; U2.3@21.704,24.762 25.022,24.762 26.416,23.368 26.416,22.269 25.979,21.832 25.979,21.807 C9.2@25.806,21.634 ; U2.4@21.704,25.162 25.511,25.162 27.178,23.495 R6.1@27.769,23.495 27.769,22.073 27.33,21.634 C10.2@27.305,21.634 C9.2@25.806,21.634 ; R2.2@24.003,18.415 24.003,21.336 24.301,21.634 C9.2@25.756,21.634 ; C9.2@25.756,21.634 C9.2@25.781,21.634 C9.2@25.806,21.634
  Bottom Layer w0.254: pad.171@15.494,22.479 17.018,24.003 18.415,24.003 18.923,23.495 ; pad.170@18.542,21.971 18.542,22.04 18.923,22.421 18.923,23.495 ; pad.169@18.796,20.32 19.812,20.32 20.193,20.701 20.193,23.622 19.812,24.003 ; pad.190@18.923,31.496 18.923,31.427 18.542,31.046 18.542,28.575 17.018,27.051 17.018,25.781 17.805,24.994 24.79,24.994 pad.195@25.4,24.384 ; pad.191@22.479,23.368 21.844,24.003 19.812,24.003 ; 18.923,23.495 19.431,24.003 19.812,24.003
5VD: C1.2 C2.2 F1.2 H3.14 pad.184 pad.230 pad.231 U1.16 U3.3 U8.3 | length 105.1
  Top Layer w0.254: pad.184@8.763,5.207 9.492,5.207 10.668,6.383 U8.3@10.668,7.074 ; H3.14@47.244,1.905 47.269,1.93 58.699,1.93 61.468,4.699 61.468,10.901 62.495,11.928 ; C2.2@55.67,18.034 C1.2@55.67,16.383 F1.2@58.04,16.383 58.04,16.321 58.58,15.781 58.642,15.781 62.495,11.928 ; U1.16@58.032,30.48 58.674,30.48 pad.230@59.944,29.21 ; pad.231@66.421,13.081 66.372,13.032 66.372,12.824 65.477,11.928 U3.3@64.797,11.928 62.495,11.928
  Bottom Layer w0.254: pad.184@8.763,5.207 10.16,5.207 11.176,6.223 22.733,6.223 23.495,5.461 24.003,5.461 24.892,4.572 44.577,4.572 H3.14@47.244,1.905 ; pad.230@59.944,29.21 61.849,27.305 61.849,13.97 62.738,13.081 pad.231@66.421,13.081
CAN_Rx: C25.2 J5.1 R17.2 U8.4 | length 10.4
  Top Layer w0.152: R17.2@10.16,4.445 C25.2@11.811,4.445 11.938,4.572 U8.4@11.938,7.074 11.938,9.652 13.843,11.557 J5.1@13.843,12.319
CAN_Tx: J4.1 U8.1 | length 10.3
  Top Layer w0.152: U8.1@8.128,7.074 8.128,8.387 8.732,8.992 10.847,8.992 13.208,11.353 13.208,13.335 13.335,13.462 J4.1@13.843,13.462
CH340G_Rx: R8.1 U1.3 | length 2.4
  Top Layer w0.152: R8.1@50.419,27.94 U1.3@52.832,27.94
CH340G_Tx: pad.176 pad.226 U1.2 U2.40 | length 50.2
  Top Layer w0.152: 14.605,20.701 14.681,20.625 15.926,20.625 17.022,21.721 17.022,22.063 17.772,22.813 17.772,23.231 U2.40@17.796,23.254 ; pad.226@30.607,26.924 38.747,26.924 39.624,27.801 39.624,28.702 40.132,29.21 43.307,29.21 43.993,29.896 48.531,29.896 49.216,29.21 U1.2@52.832,29.21
  Bottom Layer w0.152: pad.176@14.351,20.701 15.748,20.701 16.891,21.844 17.653,21.844 18.188,21.309 18.188,20.245 18.622,19.812 19.939,19.812 23.241,23.114 25.273,23.114 29.108,26.949 30.582,26.949 pad.226@30.607,26.924
DTR: pad.228 pad.229 Q2.2 R3.2 U1.13 | length 15
  Top Layer w0.152: U1.13@58.032,26.67 U1.13@58.547,26.67 ; U1.13@58.293,26.924 U1.13@58.547,26.67 ; pad.229@60.96,30.099 R3.2@60.96,31.115 ; pad.228@62.484,28.956 62.611,28.829 64.262,28.829 64.389,28.702 64.389,26.924 63.815,26.35 63.815,25.994 63.541,25.72 Q2.2@63.266,25.72 62.992,25.446 59.863,25.446 59.817,25.4 U1.13@58.547,26.67
  Bottom Layer w0.152: pad.229@60.96,30.099 60.96,30.003 61.087,29.876 61.087,29.845 61.976,28.956 pad.228@62.484,28.956
EN: C8.2 pad.189 pad.223 pad.240 pad.252 pad.253 pad.254 pad.283 Q1.3 R2.1 R13.2 U2.9 | length 90.8
  Top Layer w0.152: U2.9@21.704,27.162 22.844,27.162 pad.189@23.622,27.94 ; R2.1@24.003,17.565 24.028,17.565 24.349,17.886 24.423,17.886 25.019,18.483 25.019,18.923 25.781,19.685 27.559,19.685 27.984,20.11 27.984,20.887 28.409,21.313 28.483,21.313 28.804,21.634 C8.2@28.829,21.634 28.854,21.634 30.175,22.955 30.175,26.242 29.366,27.051 pad.223@28.321,27.051 ; pad.253@30.988,23.114 31.369,23.495 pad.252@32.385,23.495 ; R13.2@55.626,7.493 55.626,13.589 pad.283@56.769,14.732 ; pad.240@59.69,22.352 61.849,24.511 66.802,24.511 68.047,25.756 68.047,30.251 67.056,31.242 Q1.3@65.766,31.242
  Bottom Layer w0.152: pad.189@23.749,28.067 24.765,27.051 pad.223@28.321,27.051 ; pad.254@29.718,22.606 30.48,22.606 pad.253@30.988,23.114 ; pad.252@32.385,23.495 33.909,23.495 34.798,22.606 36.576,22.606 37.465,21.717 43.942,21.717 44.577,22.352 44.577,24.842 45.301,25.565 45.339,25.527 50.546,25.527 53.721,22.352 pad.240@59.69,22.352 59.69,20.701 56.769,17.78 pad.283@56.769,14.732
GND: C1.1 C2.1 C3.2 C4.1 C5.1 C6.1 C7.1 C8.1 C9.1 C10.1 C11.1 C12.2 C13.1 C15.2 C16.1 C18.1 C19.1 C20.1 C21.1 C22.1 C23.1 C25.1 C26.1 C27.1 C28.1 D1.K FPC1.3 FPC1.13 FPC1.14 FPC1.15 FPC1.16 FPC1.17 FPC1.18 FPC1.19 FPC1.20 FPC1.23 FPC1.24 H2.17 H2.18 L1.2 OLED1.7 pad.158 pad.185 pad.198 pad.214 pad.217 pad.221 pad.222 pad.284 pad.285 pad.286 pad.287 pad.288 pad.289 pad.290 pad.292 pad.293 pad.294 pad.295 pad.296 pad.297 pad.298 Q3.2 R1.1 R5.2 R7.2 R20.1 R24.1 R26.1 SW1.1 U1.1 U2.49 U3.1 U4.4 U5.1 U5.9 U5.11 U5.18 U6.9 U6.11 U7.3 U7.4 U7.5 U8.2 USB1.13 USB1.14 USB1.15 USB1.16 USB1.A1B12 USB1.B1A12 X1.2 X1.4 | length 133.8
  Top Layer w0.152: pad.158@1.5,1.5 2.413,2.413 L1.2@2.413,13.023 ; pad.158@1.5,33.5 1.613,33.387 8.015,33.387 H2.18@8.128,33.274 ; pad.284@1.651,30.48 1.651,30.556 2.413,31.318 8.077,31.318 ; U4.4@4.37,26.289 8.001,26.289 pad.286@8.382,26.67 ; C13.1@6.477,20.447 C13.1@6.502,20.447 ; pad.289@6.604,13.335 6.604,9.652 ; pad.294@7.112,30.353 8.077,31.318 ; pad.293@7.62,29.337 7.62,28.956 pad.292@8.382,28.194 ; pad.285@9.271,22.86 8.941,22.53 7.329,22.53 6.726,21.927 6.726,20.671 C13.1@6.502,20.447 ; U8.2@9.398,7.074 9.398,7.765 9.779,8.146 pad.185@9.779,8.509 ; pad.295@9.652,10.033 8.319,10.033 7.938,9.652 6.604,9.652 ; X1.2@10.879,18.937 10.355,19.461 10.005,19.461 X1.4@8.779,20.687 ; C25.1@11.811,3.595 11.786,3.595 10.731,2.54 8.382,2.54 6.604,4.318 6.604,9.652 ; C16.1@12.7,19.851 12.725,19.851 13.046,20.172 13.12,20.172 13.716,20.769 13.716,21.628 13.627,21.717 9.809,21.717 X1.4@8.779,20.687 ; C11.1@13.462,30.988 13.437,30.988 13.107,31.318 8.077,31.318 ; U7.3@18.415,12.192 U7.4@18.415,10.942 U7.5@20.615,10.942 ; U6.11@18.419,8.133 18.493,8.059 18.493,7.861 18.86,7.493 19.177,7.493 19.419,7.735 U6.9@19.419,8.133 19.419,8.208 19.685,8.474 C19.1@19.685,9.398 pad.214@20.447,9.398 ; pad.221@24.384,9.906 24.13,10.16 C20.1@24.13,11.005 ; C26.1@24.511,7.786 24.511,7.112 pad.287@25.019,6.604 ; pad.222@24.765,20.32 25.229,20.784 C9.1@25.781,20.784 C10.1@27.305,20.784 ; U5.11@25.718,12.073 25.139,12.073 24.796,11.729 24.796,11.572 24.452,11.229 24.354,11.229 C20.1@24.13,11.005 ; U5.9@25.718,13.073 24.4,13.073 23.368,12.041 23.368,11.138 23.457,11.049 24.086,11.049 C20.1@24.13,11.005 ; pad.297@27.305,26.543 28.395,25.453 28.395,25.243 R1.1@28.619,25.019 28.619,25.044 29.591,26.016 pad.298@29.591,26.035 ; pad.288@27.813,15.748 28.274,15.748 28.968,15.054 U5.1@28.968,14.823 ; U5.18@28.968,10.823 28.968,10.613 29.548,10.033 pad.296@29.718,10.033 ; FPC1.3@40.294,25.779 41.146,25.779 pad.198@41.402,26.035 ; pad.290@41.783,28.194 43.091,28.194 43.434,27.851 R26.1@43.434,27.178 ; C13.1@6.502,20.447 8.439,20.447 X1.4@8.679,20.687 X1.4@8.779,20.687
  Bottom Layer w0.152: pad.294@7.112,30.48 pad.294@7.112,30.353 7.62,29.845 pad.293@7.62,29.337 ; pad.292@8.382,28.194 pad.286@8.382,26.67 8.382,25.684 8.153,25.455 8.153,24.486 9.046,23.593 9.046,23.339 pad.285@9.525,22.86 ; pad.295@9.652,10.033 9.652,8.732 9.779,8.605 pad.185@9.779,8.509 ; H2.17@10.668,33.274 11.697,34.303 16.535,34.303 17.018,33.82 17.018,32.395 17.663,31.75 18.219,31.75 18.791,32.322 19.748,32.322 20.193,31.877 20.193,31.242 19.296,30.345 v1(19.296,26.662) v1(18.296,26.662) ; v1(18.296,25.662) v1(19.296,25.662)